# EAGLE board Master (EAGLE 9.6.2)

Size 100 x 80 mm. Coordinates in mm from the lower left corner, seen from the top.
Outline: 0,0 100,0 100,80 0,80 0,0
Copper layers (1*16): Top 0.035mm / dielectric 1.5mm / Bottom 0.035mm
Design rules "default": minimum track width 6mil, minimum drill 0.35mm, track to track 6mil, track to pad 6mil, pad to pad 6mil, via to via 6mil, smd to smd 6mil, copper to edge 40mil, drill to drill 6mil, minimum pad ring 10mil, minimum via ring 8mil, stop-mask expansion 4mil, vias tented up to drill 0mil, thermal gap 10mil
Net classes: 0 default: width 0.152 mm, drill 0.254 mm, clearance 0.152 mm; 1 5A: width 2.794 mm, drill 0.254 mm, clearance 0.152 mm
Holes 3.05 mm at 3.81,5.08

## Footprints (pad centres in the part's own frame; a part is rotated, then mirrored left to right if it is on the bottom)
TO220H = drill 1.118 long: 1 -2.54,-10.16; 2 0,-10.16; 3 2.54,-10.16 | hole 3.302: 0,4.826
C025-025X050 = drill 0.813 octagon: 1 -1.27,0; 2 1.27,0
KK-156-2 = drill 1.7 pad 2.184 long: 1 -1.98,0; 2 1.98,0
TO220 = drill 1.118 long: 1 -2.54,-6.35; 2 0,-6.35; 3 2.54,-6.35 | hole 3.302: 0,11.176
22-23-2061 = drill 1 long: 1 -6.35,0; 2 -3.81,0; 3 -1.27,0; 4 1.27,0; 5 3.81,0; 6 6.35,0
DCJ0202 = drill 1 pad 2 long: 1 0,3.1; 2 4.8,0; 3 0,-3
DIL08 = drill 0.813 long: 1 -3.81,-3.81; 2 -1.27,-3.81; 3 1.27,-3.81; 4 3.81,-3.81; 5 3.81,3.81; 6 1.27,3.81; 7 -1.27,3.81; 8 -3.81,3.81

## Placement (x,y rotation side)
5V-VRR  7805T  [TO220H]  12.7,50.8 90 top
C1  220uF 16V  [C025-025X050]  27.94,38.1 0 top
C2  0.1uF  [C025-025X050]  27.94,33.02 0 top
C3  0.1uF  [C025-025X050]  27.94,27.94 0 top
C4  22uF 16V  [C025-025X050]  27.94,22.86 0 top
LED  [KK-156-2]  45.72,10.16 0 top
LED_T  BD239  [TO220]  45.47,26.54 0 top
MEGA  [22-23-2061]  62.23,10.16 0 top
PSU  12VDC C+  [DCJ0202]  13.97,31.75 270 top
RS485-MASTER  MAX487CPA  [DIL08]  62.23,31.75 270 top
SLAVE_DATA  [22-23-2061]  30.48,10.16 0 top
SLAVE_PWR  [KK-156-2]  15.24,10.16 0 top

## Library data of the parts
5V-VRR = linear
C1-C4 = rcl; SPICEPREFIX: C
LED SLAVE_PWR = con-molex; MF: MOLEX; OC_FARNELL: unknown; OC_NEWARK: unknown
LED_T = transistor-neu-to92
MEGA SLAVE_DATA = con-molex; MF: MOLEX; MPN: 22-23-2061; OC_FARNELL: 1462922; OC_NEWARK: 27C1933
PSU = con-jack; OC_FARNELL: unknown; OC_NEWARK: unknown
RS485-MASTER = A10 Library; MPN: MAX487CPA; OC_FARNELL: unknown; OC_NEWARK: unknown

## Nets
12VCC [5A]: 5V-VRR.1 C1.1 C2.1 LED.1 PSU.2 SLAVE_PWR.1
GND: 5V-VRR.2 C1.2 C2.2 C3.2 C4.2 LED_T.3 MEGA.2 PSU.1 RS485-MASTER.5 SLAVE_PWR.2
LED_DIM: LED_T.1
LED_GND: LED.2 LED_T.2
MEGA_P2: MEGA.3 RS485-MASTER.2 RS485-MASTER.3
MEGA_P18: MEGA.4 RS485-MASTER.4
MEGA_P19: MEGA.5 RS485-MASTER.1
RS485_A: RS485-MASTER.6 SLAVE_DATA.1
RS485_B: RS485-MASTER.7 SLAVE_DATA.2
VCC: 5V-VRR.3 C3.1 C4.1 MEGA.1 RS485-MASTER.8

## Tracks (layer width: path | path; a pad name or v marks a point on that pad's centre or on a via)
12VCC  (5 unrouted)
GND  (9 unrouted)
LED_GND  (1 unrouted)
MEGA_P2  (2 unrouted)
MEGA_P18  (1 unrouted)
MEGA_P19  (1 unrouted)
RS485_A  (1 unrouted)
RS485_B  (1 unrouted)
VCC  (4 unrouted)